# Altium PCB battery_board_v2(1).PcbDoc (part 2 of 2)
Units mm, origin at the board's own origin, x right, y up, seen from the top; angles counter-clockwise.
Board outline 90.17 x 96.01 mm, 4 copper layers (F.Cu, In1.Cu, In2.Cu, B.Cu); 129 components, 185 nets, 704 pads, 113 vias.
Unrouted connection lines stored in the file: 18.
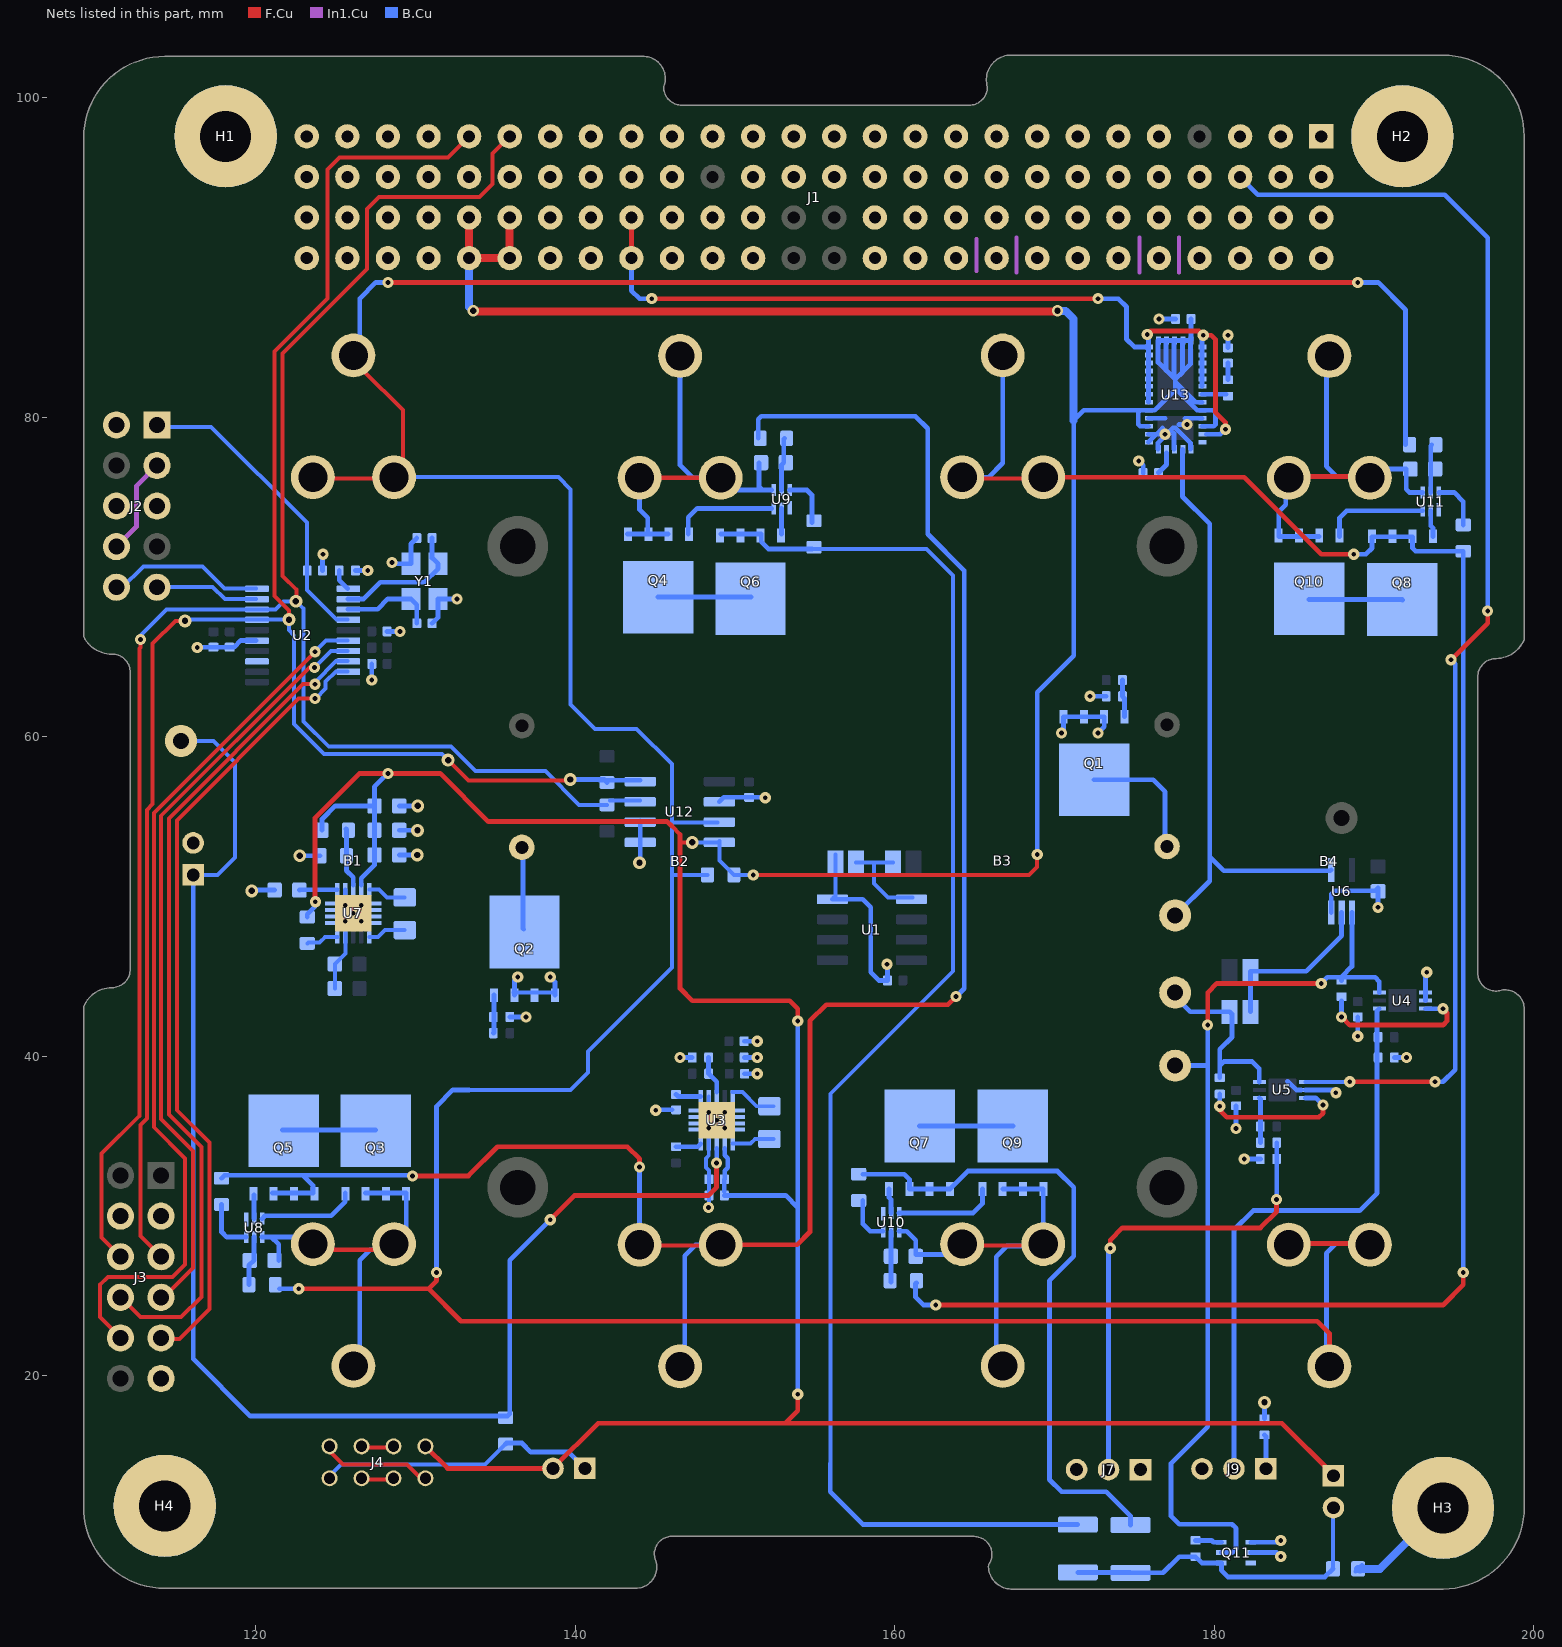
[diagram p4: the nets of this part, all layers, seen from the top]

## Via types
v1: diameter 0.7, hole 0.3, F.Cu to B.Cu, tented both sides, 93 vias
v2: diameter 0.8, hole 0.4, F.Cu to B.Cu, tented both sides, 17 vias
v3: diameter 0.7, hole 0.4, F.Cu to B.Cu, tented both sides, 3 vias

## Nets (pads, with @x,y where several pads share a name; then routed paths per layer and width w, separated by ;. In a path a pad name is that pad's centre, name@x,y a point inside that pad or via, vN(x,y) a via of type N, cw(c..) or ccw(c..) an arc to the next point about the centre after c; other vN are vias at no path point) (continued)
BCR_OUT: C8.1 C21.1 C26.1 C27.1 C28.1 C29.1 J1.93 J1.94 J1.95 J1.96 J4.1 J6.2 J8.1 R18.1 R24.1 R29.1 U3.2 U7.9 U12.8 U13.3 U13.5 U13.14 U13.15 U13.16 U13.17 U13.18 U13.26 U13.27 U13.29 | length 300.2
  F.Cu w0.25: 146.05,54.413 146.558,53.905 146.558,53.397 v2(147.32,53.397) ; v1(151.13,51.365) 168.402,51.365 168.91,51.873 v1(168.91,52.635)
  F.Cu w0.3: v1(123.725,49.689) 123.7,49.714 123.7,54.923 126.492,57.715 v1(128.27,57.715) 131.548,57.715 134.558,54.705 145.758,54.705 146.05,54.413 ; J4.1@130.618,15.596 132.001,14.213 J6.2@138.6,14.213 141.425,17.038 152.363,17.038 ; 146.558,53.905 146.558,44.253 147.32,43.491 153.416,43.491 153.924,42.983 v1(153.924,42.221) ; v1(153.924,18.853) 153.924,17.837 153.125,17.038 152.363,17.038 ; J8.1@187.425,13.838 184.225,17.038 152.363,17.038
  F.Cu w0.5: J1.95@133.35,92.513 J1.96@133.35,89.973 J1.94@135.89,89.973 J1.93@135.89,92.513 ; v3(133.604,86.671) 133.642,86.633 170.142,86.633 v3(170.18,86.671)
  B.Cu w0.25: v2(147.32,53.397) 148.924,53.397 149.01,53.483 149.01,52.278 R29.1@149.923,51.365 v1(151.13,51.365)
  B.Cu w0.3: R24.1@123.22,48.728 123.22,48.893 123.725,49.398 v1(123.725,49.689) ; R18.1@124.143,54.159 124.143,54.858 124.968,55.683 C26.1@127.425,55.683 ; U7.9@126.6,50.723 126.6,51.153 127.425,51.978 C28.1@127.425,52.613 127.425,54.513 C26.1@127.425,55.438 ; 127.425,54.758 C26.1@127.425,55.683 ; v1(128.27,57.715) 127.425,56.87 C26.1@127.425,55.683 ; C29.1@149.324,31.299 153.162,31.299 153.924,30.537 ; C29.1@149.324,31.553 C8.1@149.324,32.315 ; C8.1@149.35,32.315 149.35,32.847 149.544,33.041 149.544,33.621 149.35,33.815 U3.2@149.35,34.253 ; v1(153.924,18.853) 153.924,30.537 ; v1(153.924,42.221) 153.924,30.537 ; v1(168.91,52.635) 168.91,57.969 168.91,62.795 169.672,63.557 171.196,65.081 171.196,72.193 171.196,79.813 171.45,80.067 171.831,80.448 U13.5@175.87,80.448 ; U13.3@175.87,79.447 175.347,79.447 175.235,79.559 175.235,80.321 175.362,80.448 U13.5@175.87,80.448 ; U13.15@176.979,84.817 176.979,82.945 177.546,82.378 ; U13.16@177.479,84.817 177.479,82.445 177.546,82.378 ; U13.17@178.003,84.817 178.003,82.836 177.546,82.378 ; U13.18@178.529,84.817 178.534,84.822 C21.1@178.534,86.163 ; U13.29@179.222,79.447 179.948,79.447 180.061,79.559 180.061,80.321 179.934,80.448 179.222,80.448 178.918,80.448 177.546,81.82 177.546,82.378 ; U13.26@179.222,80.95 178.829,80.95 177.546,82.233 177.546,82.378 ; U13.5@175.87,80.448 176.261,80.448 177.546,81.733 177.546,82.378 ; 177.546,82.378 176.479,83.445 176.479,84.817 178.503,84.817 178.503,83.336 177.546,82.378
  B.Cu w0.5: J1.96@133.35,89.973 133.35,86.925 v3(133.604,86.671) ; v3(170.18,86.671) 170.688,86.671 171.196,86.163 171.196,79.813
EN_D1: TP6.1 U6.4 U13.33 | length 39
  B.Cu w0.3: TP6.1@177.546,48.825 179.704,50.983 179.704,52.763 ; U13.33@178.003,78.01 178.003,75.952 178.003,75.038 179.704,73.337 179.704,52.763 ; U6.4@187.31,51.679 187.25,51.619 180.594,51.619 179.704,52.509 179.704,52.763
EN_D3: Q11.5 R22.1 TP3.1 U4.6 U6.1 | length 58.9
  F.Cu w0.3: v1(179.578,41.967) 179.578,43.999 180.152,44.573 v1(186.69,44.573)
  B.Cu w0.3: TP3.1@177.546,39.427 179.578,39.427 ; v1(179.578,41.967) 179.578,39.427 ; Q11.5@180.436,8.947 181.102,8.947 181.356,9.201 181.356,10.471 181.102,10.725 177.8,10.725 177.292,11.233 177.292,14.535 179.578,16.821 179.578,39.427 ; v1(186.69,44.573) 187.07,44.953 190.054,44.953 190.322,44.685 U4.6@190.322,43.991 ; R22.1@187.96,44.763 187.96,44.985 188.61,45.635 U6.1@188.61,49.019
EPS_INT: J1.6 U5.1 | length 79.9
  F.Cu w0.3: v1(188.468,38.411) v1(193.802,38.411) ; v1(194.818,64.827) 197.104,67.113 v1(197.104,67.875)
  B.Cu w0.25: U5.1@185.708,38.403 188.46,38.403 v1(188.468,38.411)
  B.Cu w0.3: J1.6@181.61,95.053 182.722,93.941 194.406,93.941 197.104,91.243 v1(197.104,67.875) ; v1(193.802,38.411) 194.31,38.411 195.072,39.173 195.072,64.573 v1(194.818,64.827)
GND: C1.2 C2.2 C3.2 C4.2 C5.2 C6.2 C7.2 C8.2 C9.2 C10.2 C11.2 C12.2 C13.2 C14.1 C15.2 C20.1 C21.2 C22.2 C23.2 C24.2 C25.2 C26.2 C27.2 C28.2 C29.2 C30.2 C31.2 J1.61 J1.66 J1.69 J1.73 J1.74 J1.81 J1.82 J1.84 J1.99 J1.100 J2.3 J2.8 J3.3 J3.4 J3.11 J5.2 J7.3 JP4.1 Q1.1 Q1.2 Q1.3 Q2.1 Q2.2 Q2.3 Q11.1 Q11.2 R2.1 R7.1 R9.2 R10.2 R12.2 R15.2 R19.2 R21.2 U1.4 U2.15 U3.4 U3.7 U3.11 U4.1 U4.2 U5.2 U6.3 U7.4 U7.7 U7.11 U12.1 U12.2 U12.6 U13.1 U13.2 U13.4 U13.28 U13.32 U13.34 U13.36 Y1.2 Y1.4 | length 112
  In1.Cu w0.25: 165.1,89.163 165.1,91.163 ; 167.6,89.063 167.6,91.263 ; 175.3,89.063 175.3,91.263 ; 177.8,89.063 177.8,91.263
  In1.Cu w0.3: J2.8@111.272,71.909 112.522,73.159 112.522,75.699 J2.3@113.812,76.989
  B.Cu w0.25: C30.2@124.942,44.253 C31.2@124.942,45.777 125.6,46.435 U7.4@125.6,47.488 U7.11@125.6,48.463 ; Q2.3@136.14,44.011 137.41,44.011 Q2.1@138.68,44.011 ; v1(148.336,30.537) 148.364,30.565 C29.2@148.364,31.299 148.364,32.856 148.169,33.051 148.169,33.611 148.35,33.792 U3.4@148.35,34.538 U3.11@148.35,35.513 ; U3.11@148.35,36.513 U3.7@148.35,37.488 ; U1.4@156.165,49.938 156.27,50.043 JP4.1@156.27,52.648
  B.Cu w0.3: v1(116.332,65.589) 116.36,65.617 C5.2@117.348,65.617 C6.2@118.364,65.617 118.646,65.617 119.067,66.038 U2.15@120.025,66.038 ; v2(119.75,50.363) 119.8,50.413 C25.2@121.175,50.413 ; v2(122.75,52.563) R19.2@124.025,52.563 ; C3.2@124.178,70.415 124.178,71.403 v1(124.206,71.431) ; U7.7@125.6,50.438 U7.11@125.6,49.463 U7.11@126.1,48.963 ; R9.2@126.24,70.415 v1(127,70.415) ; v1(127.254,63.557) 127.259,63.562 C9.2@127.259,64.573 ; C7.2@128.219,66.605 v1(129.032,66.605) ; v1(128.524,70.923) 128.61,70.837 Y1.4@129.706,70.837 129.706,72.077 C2.2@130.076,72.447 ; C28.2@128.975,52.613 v2(130.1,52.613) ; C27.2@128.975,54.159 130.11,54.159 v2(130.12,54.149) ; C26.2@128.975,55.683 130.13,55.683 v2@130.14,55.673 ; C4.2@131.036,67.113 131.406,67.483 Y1.2@131.406,68.637 v1(132.588,68.637) ; R7.1@135.892,42.475 v1(136.906,42.475) ; Q2.3@136.183,43.839 136.183,44.749 v1(136.398,44.964) ; v1(138.43,44.964) 138.723,44.671 Q2.1@138.723,43.839 ; v2(144.018,52.127) 144.06,52.169 U12.2@144.06,54.753 ; v1(145.034,36.633) 145.062,36.661 C13.2@146.05,36.661 ; v1(146.558,39.935) R21.2@147.318,39.935 ; U12.6@149.01,55.937 149.292,56.219 C20.1@150.876,56.219 151.864,56.219 v1(151.892,56.191) ; C15.2@150.566,39.935 v1(151.384,39.935) ; C12.2@150.566,40.951 v1(151.384,40.951) ; C23.2@150.594,38.919 v1(151.384,38.919) ; U1.4@156.086,49.841 157.988,49.841 158.496,49.333 158.496,45.269 159.004,44.761 C1.2@159.54,44.761 159.54,45.749 v1(159.512,45.777) ; v1(170.434,60.255) 170.561,60.382 Q1.1@170.561,61.265 Q1.3@173.101,61.265 173.101,60.636 v1(172.72,60.255) ; v1(172.212,62.541) R2.1@173.226,62.541 ; v1(175.26,77.273) 175.542,76.991 C22.2@175.542,76.511 ; U13.1@175.87,78.445 176.755,79.33 ; U13.2@175.87,78.947 v1(176.908,78.947) v1@177.162,78.947 ; U13.4@175.87,79.947 176.93,79.947 ; U13.36@176.479,78.01 176.479,78.403 177.407,79.33 177.546,79.33 ; v1(176.53,86.163) C21.2@177.574,86.163 ; U13.34@177.479,78.01 177.479,79.01 ; 177.576,79.33 178.503,78.403 U13.32@178.503,78.01 ; 177.775,79.559 v1(178.283,79.559) ; 178.162,79.947 U13.28@179.222,79.947 ; C24.2@180.848,84.357 v1(180.848,85.147) ; v1(181.356,35.492) C11.2@181.356,36.915 ; v1(181.864,33.585) R12.2@182.878,33.585 ; Q11.2@182.276,8.947 183.896,8.947 v1(184.15,8.693) ; Q11.1@182.276,9.597 184.038,9.597 v1(184.15,9.709) ; R10.2@183.134,17.331 v2(183.134,18.345) ; 184.575,38.446 185.118,37.903 U5.2@185.42,37.903 ; U5.2@185.708,37.903 187.428,37.903 v1(187.602,37.728) ; U6.3@187.31,49.019 187.31,50.163 187.521,50.374 190.074,50.374 190.246,50.546 v1(190.246,49.333) ; v1(188.976,41.267) C10.2@188.976,42.475 ; R15.2@191.264,39.935 v1(192.024,39.935) ; U4.2@193.218,43.491 U4.1@193.218,43.991 193.218,45.193 v1(193.294,45.269)
  other v2: 130.14,55.683
I2C_SCK: J1.43 J3.5 R34.1 U2.17 U12.4 | length 118.6
  F.Cu w0.25: J3.5@114.165,27.383 112.776,28.772 112.776,35.703 113.175,36.102 113.175,55.439 113.538,55.802 113.538,65.843 114.959,67.264 v2(115.57,67.264) ; v2(122.075,67.343) 122.075,67.9 121.158,68.816 121.158,84.121 124.475,87.438 124.475,95.513 125.225,96.263 132.02,96.263 J1.43@133.35,97.593 ; v2(132.037,58.551) 133.325,57.263 139.6,57.263 v2(139.675,57.338)
  B.Cu w0.25: v2(115.57,67.264) 115.645,67.338 120.025,67.338 120.03,67.343 v2(122.075,67.343) 122.075,66.679 122.391,66.362 122.391,60.8 124.253,58.938 131.65,58.938 v2(132.037,58.551)
  B.Cu w0.3: v2(139.675,57.338) 141.792,57.338 R34.1@141.986,57.144 ; R34.1@141.515,57.293 U12.4@144.06,57.293
I2C_SDA: J1.41 J3.6 R35.1 U2.18 U12.3 | length 120.9
  F.Cu w0.25: J3.6@111.625,27.383 110.35,28.658 110.35,33.913 112.725,36.288 112.725,65.538 112.776,65.589 v1(112.776,66.097) ; v2(122.51,68.489) 122.54,68.519 122.54,69.213 121.666,70.087 121.666,83.993 126.95,89.277 126.95,93.038 127.7,93.788 133.988,93.788 134.803,94.603 134.803,96.506 J1.41@135.89,97.593
  B.Cu w0.25: v1(112.776,66.097) 112.776,66.351 113.03,66.605 114.413,67.988 121.235,67.988 121.736,68.489 v2(122.51,68.489) 122.975,68.024 122.975,60.978 124.565,59.388 128.95,59.388 ; 128.984,59.388 132.225,59.388 133.75,57.863 138.125,57.863 140.242,55.746 R35.1@141.986,55.746 ; R35.1@142.17,56.023 U12.3@144.06,56.023
IV_MON_N: B1.1 B4.1 R25.1 R29.2 R33.1 U12.7 | length 256.9
  F.Cu w0.25: B1.1@124.177,76.179 129.257,76.179 129.2,76.236 129.2,80.463 B1.1@126.717,82.946
  F.Cu w0.3: v1(122.682,25.457) 130.81,25.457 ; v1(128.27,88.449) v1(188.976,88.449) ; v1(131.318,26.473) 131.318,25.965 130.81,25.457 ; B4.1@184.468,28.297 B4.1@189.548,28.297 ; B4.1@187.198,20.599 187.198,22.663 186.436,23.425 132.842,23.425 130.81,25.457
  B.Cu w0.25: B1.1@128.651,76.257 138.938,76.257 139.7,75.495 139.7,62.033 141.224,60.509 143.827,60.509 146.04,58.297 146.04,54.711 145.996,54.667 ; 133.35,37.903 139.7,37.903 140.8,39.003 140.8,40.313 146.05,45.563 146.05,51.365 ; R29.2@148.273,51.365 146.05,51.365 ; U12.7@148.895,54.638 146.05,54.638 146.05,51.365
  B.Cu w0.3: R25.1@121.475,25.457 v1(122.682,25.457) ; B1.1@126.5,83.516 126.5,87.441 127.508,88.449 v1(128.27,88.449) ; v1(131.318,26.473) 131.318,36.887 132.334,37.903 133.35,37.903 ; B4.1@187.008,20.677 187.008,27.68 187.625,28.297 B4.1@189.548,28.297 ; v1(188.976,88.449) 190.246,88.449 191.961,86.734 R33.1@191.961,78.289
Net-(B1-Pad2): B1.2 C16.1 Q3.1 Q3.2 Q3.3 U8.4 | length 27.2
  F.Cu w0.3: B1.2@123.96,27.896 B1.2@129.04,27.896
  B.Cu w0.3: U8.4@120.388,28.692 123.164,28.692 B1.2@123.96,27.896 ; U8.4@120.396,28.692 120.979,28.692 121.433,28.238 C16.1@121.433,27.235 ; B1.2@126.5,20.27 126.5,27.243 127.153,27.896 129.04,27.896 129.413,28.269 129.413,31.447 Q3.3@126.873,31.447
Net-(B2-Pad1): B2.1 Q5.1 Q5.2 Q5.3 R26.1 R27.2 | length 129
  F.Cu w0.25: B2.1@144.277,28.179 B2.1@149.357,28.179
  F.Cu w0.3: v1(129.801,32.526) 133.307,32.526 135.128,34.347 143.256,34.347 144.018,33.585 v1(144.018,33.077) ; B2.1@149.098,28.219 153.892,28.219 154.686,29.013 154.686,32.061 154.686,42.221 155.702,43.237 163.322,43.237 v1(163.83,43.745)
  B.Cu w0.3: R27.2@117.856,32.378 118.047,32.569 122.936,32.569 ; Q5.3@121.031,31.447 123.571,31.447 123.571,31.934 122.936,32.569 ; v1(129.801,32.526) 129.758,32.569 122.936,32.569 ; B2.1@144.018,28.497 v1(144.018,33.077) ; B2.1@146.85,20.585 146.85,27.527 147.528,28.205 B2.1@149.39,28.205 ; R26.1@151.448,78.691 151.448,79.877 151.638,80.067 161.29,80.067 162.052,79.305 162.052,72.701 164.338,70.415 164.338,44.253 v1(163.83,43.745)
Net-(B2-Pad2): B2.2 C17.1 Q4.1 Q4.2 Q4.3 U9.4 | length 26.9
  F.Cu w0.3: B2.2@144.018,76.219 B2.2@149.098,76.219
  B.Cu w0.3: Q4.1@143.256,72.701 Q4.3@145.796,72.701 ; B2.2@144.018,76.219 144.018,74.225 144.526,73.717 Q4.2@144.526,72.701 ; B2.2@146.558,83.845 146.558,77.019 147.358,76.219 B2.2@149.098,76.219 149.861,75.456 152.281,75.456 151.698,75.456 151.498,75.656 C17.1@151.498,77.167
Net-(B3-Pad1): B3.1 Q8.1 Q8.2 Q8.3 R31.2 R32.1 | length 126.6
  F.Cu w0.25: B3.1@164.36,76.179 B3.1@169.44,76.179
  F.Cu w0.3: v1(162.56,24.441) 194.31,24.441 195.58,25.711 v1(195.58,26.473) ; B3.1@169.291,76.257 181.864,76.257 186.69,71.431 v1(188.722,71.431)
  B.Cu w0.3: R32.1@161.353,25.823 161.29,25.76 161.29,24.949 161.798,24.441 v1(162.56,24.441) ; B3.1@164.211,76.257 165.862,76.257 166.751,77.146 166.751,83.362 B3.1@166.35,83.763 ; v1(188.722,71.431) 189.484,71.431 189.865,71.812 189.865,72.529 192.405,72.529 192.405,71.812 192.595,71.622 R31.2@195.58,71.622 v1(195.58,26.473)
Net-(B3-Pad2): B3.2 C18.1 Q9.1 Q9.2 Q9.3 U10.4 | length 26
  F.Cu w0.25: B3.2@164.36,28.179 B3.2@169.44,28.179
  B.Cu w0.3: U10.4@160.266,29.058 160.737,29.058 161.303,28.492 161.303,27.601 163.268,27.601 B3.2@163.81,28.143 ; B3.2@166.35,20.517 166.35,27.469 167.024,28.143 168.89,28.143 169.291,28.544 Q9.1@169.291,31.701 Q9.3@166.751,31.701
Net-(B4-Pad2): B4.2 C19.1 Q10.1 Q10.2 Q10.3 U11.4 | length 25.9
  F.Cu w0.3: B4.2@184.468,76.297 B4.2@189.065,76.297
  B.Cu w0.3: B4.2@184.468,76.297 184.468,74.543 184.023,74.098 184.023,72.553 Q10.3@186.563,72.553 ; B4.2@187.008,83.923 187.008,76.955 187.666,76.297 189.548,76.297 190.016,76.765 192.011,76.765 192.011,75.508 192.211,75.308 U11.4@193.048,75.308
Net-(C2-Pad1): C2.1 U2.2 Y1.1 | length 8.5
  B.Cu w0.3: U2.2@125.75,68.638 126.747,68.638 127.79,69.681 128.27,69.681 128.276,69.687 130.556,69.687 131.406,70.537 Y1.1@131.406,70.837 131.036,71.207 C2.1@131.036,72.447
Net-(C4-Pad1): C4.1 U2.3 Y1.3 | length 5.9
  B.Cu w0.3: U2.3@125.75,67.988 127.621,67.988 128.27,68.637 Y1.3@129.706,68.637 130.076,68.267 C4.1@130.076,67.113
Net-(C13-Pad1): C13.1 U3.6 | length 1.6
  B.Cu w0.3: C13.1@146.304,37.621 146.437,37.488 U3.6@147.85,37.488
Net-(C16-Pad2): C16.2 R25.2 U8.5 | length 3.1
  B.Cu w0.3: R25.2@119.571,25.711 119.571,26.931 119.888,27.248 U8.5@119.888,28.692
Net-(C17-Pad2): C17.2 R26.2 U9.5 | length 3.3
  B.Cu w0.3: U9.5@152.908,75.456 152.908,77.027 153.048,77.167 153.048,78.641 R26.2@153.098,78.691
Net-(C18-Pad2): C18.2 R32.2 U10.5 | length 3.2
  B.Cu w0.3: R32.2@159.753,25.873 159.753,27.601 159.766,27.614 U10.5@159.766,29.058
Net-(C19-Pad2): C19.2 R33.2 U11.5 | length 3
  B.Cu w0.3: U11.5@193.548,75.308 193.548,78.226 R33.2@193.611,78.289
Net-(C22-Pad1): C22.1 U13.35 | length 1.4
  B.Cu w0.3: C22.1@176.502,76.55 177.005,77.052 U13.35@177.005,77.781
Net-(C24-Pad1): C24.1 R37.2 | length 1
  B.Cu w0.3: R37.2@180.848,82.355 C24.1@180.848,83.397
Net-(C25-Pad1): C25.1 U7.6 | length 2.4
  B.Cu w0.3: C25.1@122.725,50.413 122.75,50.438 U7.6@125.1,50.438
Net-(F1-Pad1): F1.1 Q6.1 Q6.2 Q6.3 R28.2 | length 92.8
  B.Cu w0.25: R28.2@154.813,71.77 161.967,71.77 163.64,70.097 163.64,45.333 155.956,37.649 155.956,14.535
  B.Cu w0.3: Q6.1@149.098,72.701 151.638,72.701 151.638,72.214 152.082,71.77 R28.2@154.813,71.77 ; 155.956,14.535 155.956,12.757 158.012,10.701 F1.1@171.45,10.701
Net-(F2-Pad1): F2.1 Q7.1 Q7.2 Q7.3 R30.2 | length 40.3
  B.Cu w0.3: R30.2@157.988,32.632 160.592,32.632 160.909,32.315 Q7.3@160.909,31.701 Q7.1@163.449,31.701 164.571,32.823 170.18,32.823 171.196,31.807 171.196,27.489 169.672,25.965 169.672,13.519 170.434,12.757 173.228,12.757 174.752,11.233 F2.1@174.752,10.677
Net-(FB1-Pad1): FB1.1 H3.1 | length 7.7
  B.Cu w0.25: FB1.1@188.82,7.771 FB1.1@189.225,8.176
  B.Cu w0.5: FB1.1@189.001,7.931 190.373,7.931 H3.1@194.31,11.868 ; FB1.1@189.108,7.896 FB1.1@189.225,8.013
Net-(J4-Pad2): J4.2 J4.3 | length 2
  F.Cu w0.25: J4.3@126.4,15.519 J4.2@128.4,15.519
Net-(J4-Pad4): J4.4 J4.5 | length 6.8
  F.Cu w0.25: J4.4@124.4,15.519 125.465,14.454 129.465,14.454 J4.5@130.4,13.519
Net-(J4-Pad6): J4.6 J4.7 | length 2
  F.Cu w0.25: J4.7@126.4,13.519 J4.6@128.4,13.519
Net-(J4-Pad8): J4.8 J6.1 R13.1 | length 17.8
  B.Cu w0.25: J4.8@124.4,13.519 125.335,14.454 134.348,14.454 R13.1@135.636,15.742
  B.Cu w0.3: R13.1@135.636,15.742 135.699,15.805 136.652,15.805 137.219,15.238 139.575,15.238 J6.1@140.6,14.213
Net-(J5-Pad1): J5.1 R13.2 TP1.1 U3.3 | length 91.8
  F.Cu w0.3: v1(138.43,29.775) 139.954,31.299 148.336,31.299 148.844,31.807 v1(148.844,33.331)
  B.Cu w0.25: TP1.1@115.316,59.747 117.348,59.747 118.69,58.405 118.69,52.453 117.602,51.365 J5.1@116.078,51.365
  B.Cu w0.3: J5.1@116.325,51.463 116.227,51.365 J5.1@116.078,51.365 116.078,21.064 119.654,17.488 135.75,17.488 135.89,17.628 135.89,27.235 v1(138.43,29.775) ; v1(148.844,33.331) 148.85,33.337 U3.3@148.85,34.253
Net-(J7-Pad2): J7.2 R12.1 R16.2 | length 29.9
  F.Cu w0.3: v1(173.482,27.997) 173.482,28.505 174.244,29.267 182.88,29.267 183.896,30.283 v1(183.896,31.049)
  B.Cu w0.3: J7.2@173.375,14.138 173.375,27.89 v1(173.482,27.997) ; v1(183.896,31.049) 183.898,31.05 R12.1@183.898,33.585 R16.2@183.898,34.601
Net-(J9-Pad1): J9.1 R10.1 | length 2.2
  B.Cu w0.3: R10.1@183.134,16.311 183.225,16.22 J9.1@183.225,14.188
Net-(J9-Pad2): J9.2 R14.2 R15.1 U4.4 | length 36.5
  B.Cu w0.3: J9.2@181.225,14.188 181.225,29.136 182.438,30.349 189.099,30.349 190.183,31.433 190.183,42.852 U4.4@190.322,42.991
Net-(JP1-Pad1): JP1.1 JP2.1 U6.2 | length 10.6
  B.Cu w0.3: JP1.1@182.258,42.795 JP2.1@182.258,45.335 185.74,45.335 187.96,47.555 U6.2@187.96,49.019
Net-(JP1-Pad2): JP1.2 R23.1 TP4.1 U5.6 | length 12.7
  B.Cu w0.3: TP4.1@177.546,43.745 178.496,42.795 JP1.2@180.958,42.795 181.102,42.651 181.102,41.205 180.34,40.443 R23.1@180.34,38.667 180.34,39.427 180.594,39.681 182.372,39.681 182.812,39.241 U5.6@182.812,38.403
Net-(JP3-Pad1): JP3.1 JP4.2 U1.5 | length 6.4
  B.Cu w0.25: JP4.2@157.57,52.127 158.685,52.127 ; JP3.1@159.878,52.127 158.685,52.127 ; U1.5@161.115,49.938 159.575,49.938 158.685,50.828 158.685,52.127
Net-(L1-Pad1): L1.1 U3.1 | length 2.7
  B.Cu w0.25: U3.1@149.85,34.538 150.965,34.538 151.26,34.833 L1.1@152.39,34.833
Net-(L1-Pad2): L1.2 U3.10 | length 2.9
  B.Cu w0.25: U3.10@149.85,37.773 150.46,37.773 151.35,36.883 L1.2@152.39,36.883
Net-(L2-Pad1): L2.1 U7.1 | length 2.4
  B.Cu w0.25: U7.1@127.1,47.488 127.655,47.488 128.075,47.908 L2.1@129.32,47.908
Net-(L2-Pad2): L2.2 U7.10 | length 2.4
  B.Cu w0.25: U7.10@127.1,50.438 127.72,50.438 128.2,49.958 L2.2@129.32,49.958
Net-(Q1-Pad4): Q1.4 R1.2 R2.2 | length 2.3
  B.Cu w0.3: R1.2@174.246,63.557 R2.2@174.246,62.541 174.371,62.416 Q1.4@174.371,61.265
Net-(Q1-Pad5): Q1.5 R3.1 | length 8.1
  B.Cu w0.3: Q1.5@172.466,57.315 176.168,57.315 176.91,56.573 R3.1@176.91,53.183
Net-(Q2-Pad4): Q2.4 R6.2 R7.2 | length 2.4
  B.Cu w0.3: R6.2@134.872,41.459 134.913,41.5 Q2.4@134.913,43.839
Net-(Q2-Pad5): Q2.5 R8.1 | length 5.1
  B.Cu w0.3: R8.1@136.725,53.086 136.725,48.011 Q2.5@136.775,47.961
Net-(Q3-Pad4): Q3.4 U8.3 | length 6.2
  B.Cu w0.3: U8.3@120.388,29.842 120.575,30.029 124.714,30.029 125.603,30.918 Q3.4@125.603,31.447
Net-(Q3-Pad5): Q3.5 Q5.5 | length 5.8
  B.Cu w0.3: Q5.5@121.666,35.397 Q3.5@127.508,35.397
Net-(Q4-Pad4): Q4.4 U9.3 | length 6.5
  B.Cu w0.3: Q4.4@147.066,72.701 147.066,73.738 147.634,74.306 U9.3@152.281,74.306
Net-(Q4-Pad5): Q4.5 Q6.5 | length 5.8
  B.Cu w0.3: Q4.5@145.161,68.751 Q6.5@151.003,68.751
Net-(Q5-Pad4): Q5.4 U8.2 | length 1.5
  B.Cu w0.3: U8.2@119.888,29.842 Q5.4@119.888,31.32
Net-(Q6-Pad4): Q6.4 U9.2 | length 1.6
  B.Cu w0.3: Q6.4@152.908,72.701 U9.2@152.908,74.306
Net-(Q7-Pad4): Q7.4 U10.2 | length 1.5
  B.Cu w0.3: Q7.4@159.639,31.701 159.639,31.172 159.766,31.045 U10.2@159.766,30.208
Net-(Q7-Pad5): Q7.5 Q9.5 | length 5.8
  B.Cu w0.3: Q7.5@161.544,35.651 Q9.5@167.386,35.651
Net-(Q8-Pad4): Q8.4 U11.2 | length 1.7
  B.Cu w0.3: U11.2@193.548,74.158 193.548,73.209 193.675,73.082 Q8.4@193.675,72.529
Net-(Q9-Pad4): Q9.4 U10.3 | length 6.4
  B.Cu w0.3: U10.3@160.266,30.208 164.898,30.208 165.481,30.791 Q9.4@165.481,31.701
Net-(Q10-Pad4): Q10.4 U11.3 | length 6.6
  B.Cu w0.3: Q10.4@187.833,72.553 187.833,73.717 188.274,74.158 U11.3@193.048,74.158
Net-(Q10-Pad5): Q8.5 Q10.5 | length 5.9
  B.Cu w0.3: Q10.5@185.928,68.603 191.746,68.603 Q8.5@191.77,68.579
Net-(Q11-Pad6): Q11.6 R36.2 | length 1.7
  B.Cu w0.3: R36.2@178.816,9.711 179.83,9.711 179.944,9.597 Q11.6@180.436,9.597
Net-(R9-Pad1): R9.1 U2.1 | length 1.3
  B.Cu w0.3: R9.1@125.22,70.415 125.22,69.818 U2.1@125.75,69.288
Net-(R11-Pad2): R11.2 R16.1 U5.4 | length 2.8
  B.Cu w0.3: U5.4@182.812,37.403 182.878,37.337 R11.2@182.878,35.617 R16.1@182.878,34.601
Net-(R17-Pad2): R17.2 U3.5 | length 1.6
  B.Cu w0.3: R17.2@146.306,34.347 147.659,34.347 U3.5@147.85,34.538
Net-(R18-Pad2): R18.2 R19.1 U7.8 | length 3.7
  B.Cu w0.3: R18.2@125.65,54.238 125.675,54.213 R19.1@125.675,52.563 125.675,51.628 126.1,51.203 U7.8@126.1,50.723
Net-(R20-Pad2): R20.2 R21.1 U3.8 | length 2.4
  B.Cu w0.3: R21.1@148.338,39.935 R20.2@148.338,38.919 148.85,38.407 U3.8@148.85,37.773
Net-(R22-Pad2): R22.2 U4.3 | length 10.2
  F.Cu w0.3: v1(187.96,42.475) 188.468,41.967 193.294,41.967 ; 193.04,41.967 194.31,41.967 194.564,42.221 194.564,42.729 v1(194.31,42.983)
  B.Cu w0.3: v1(187.96,42.475) R22.2@187.96,43.489 ; U4.3@193.218,42.991 194.302,42.991 v1(194.31,42.983)
Net-(R23-Pad2): R23.2 U5.3 | length 9.5
  F.Cu w0.3: v1(180.34,36.887) 180.34,36.633 180.782,36.191 186.546,36.191 186.8,36.445 v1(186.8,36.953)
  B.Cu w0.3: v1(180.34,36.887) R23.2@180.34,37.647 ; U5.3@185.708,37.403 186.35,37.403 v1(186.8,36.953)
Net-(R24-Pad2): R24.2 U7.5 | length 2
  B.Cu w0.25: R24.2@123.22,47.078 123.285,47.143 124,47.143 124.345,47.488 U7.5@125.1,47.488
Net-(R27-Pad1): R27.1 U8.6 | length 3.4
  B.Cu w0.3: R27.1@117.856,30.728 117.856,29.013 118.177,28.692 U8.6@119.388,28.692
Net-(R28-Pad1): R28.1 U9.6 | length 3.3
  B.Cu w0.3: U9.6@153.408,75.456 154.492,75.456 154.813,75.135 R28.1@154.813,73.42
Net-(R30-Pad1): R30.1 U10.6 | length 2.9
  B.Cu w0.3: R30.1@157.988,30.982 157.988,29.521 158.451,29.058 U10.6@159.266,29.058
Net-(R31-Pad1): R31.1 U11.6 | length 3.2
  B.Cu w0.3: U11.6@194.048,75.308 195.005,75.308 195.58,74.733 R31.1@195.58,73.272
Net-(R37-Pad1): R37.1 U13.25 | length 1.5
  B.Cu w0.3: U13.25@179.222,81.45 R37.1@180.745,81.45
NRST: C3.1 J2.1 U2.4 | length 19.1
  B.Cu w0.25: J2.1@114.115,79.413 117.19,79.413 123.19,73.413 123.19,69.209 125.061,67.338 U2.4@125.75,67.338
PACK_N: F1.2 F2.2 FB1.2 J8.2 Q11.4 R36.1 | length 21.4
  B.Cu w0.25: J8.2@187.42,11.833 187.425,11.838 FB1.2@187.425,7.933
  B.Cu w0.3: F1.2@171.45,7.701 174.728,7.701 F2.2@174.752,7.677 176.784,7.677 177.798,8.691 R36.1@178.816,8.691 179.21,8.297 Q11.4@180.436,8.297 180.436,7.835 180.848,7.423 186.919,7.423 FB1.2@187.427,7.931 FB1.2@187.391,7.896
PCM_IN: J1.87 J1.88 U13.6 U13.7 U13.8 U13.9 U13.10 U13.11 U13.12 U13.13 U13.19 U13.20 U13.21 U13.22 U13.23 U13.24 U13.30 | length 59.5
  F.Cu w0.3: J1.88@143.51,89.973 J1.87@143.51,92.513 ; v1(144.78,87.433) v1(172.72,87.433) ; v1(175.796,85.197) 176,85.401 179.045,85.401 v1(179.299,85.147) 179.807,85.147 180.061,84.893 180.061,80.321 180.694,79.688 v1(180.694,79.261)
  B.Cu w0.3: J1.88@143.51,89.973 143.51,87.941 144.018,87.433 v1(144.78,87.433) ; v1(172.72,87.433) 173.99,87.433 174.498,86.925 174.498,84.893 174.981,84.41 175.87,84.41 175.87,83.75 ; v1(175.796,85.197) 175.87,85.124 175.87,83.75 ; U13.6@175.87,80.95 175.87,83.75 ; U13.24@179.222,81.95 179.222,84.41 179.222,85.071 v1(179.299,85.147) ; U13.30@179.486,78.945 179.488,78.947 180.379,78.947 v1(180.694,79.261)
SWCLK: J2.10 U2.20 | length 9.6
  B.Cu w0.25: J2.10@111.575,69.253 111.575,69.287 112.958,70.669 116.669,70.669 118.05,69.288 U2.20@120.025,69.288
SWDIO: J2.9 U2.19 | length 6.3
  B.Cu w0.25: J2.9@114.115,69.253 114.261,69.399 117.303,69.399 118.064,68.638 U2.19@120.025,68.638
SYS_GPIO1: J3.10 U2.6 | length 55.5
  F.Cu w0.25: J3.10@111.625,22.303 110.236,23.692 110.236,25.711 110.733,26.208 114.797,26.208 115.57,26.981 115.57,33.623 113.625,35.569 113.625,55.253 123.698,65.326 v1(123.698,65.335)
  B.Cu w0.25: v1(123.698,65.335) 124.401,66.038 U2.6@125.75,66.038
SYS_GPIO2: J3.7 U2.7 | length 47.8
  F.Cu w0.25: J3.7@114.165,24.843 116.078,26.756 116.078,34.093 114.075,36.096 114.075,55.066 123.354,64.345 v1(123.672,64.345)
  B.Cu w0.25: v1(123.672,64.345) 124.714,65.388 U2.7@125.75,65.388
SYS_GPIO3: J3.8 U2.8 | length 52.1
  F.Cu w0.25: J3.8@111.625,24.843 112.789,23.679 115.316,23.679 116.586,24.949 116.586,34.347 114.554,36.379 114.554,54.909 122.948,63.303 v1(123.698,63.303)
  B.Cu w0.25: v1(123.698,63.303) 123.698,63.417 125.019,64.738 U2.8@125.75,64.738
SYS_GPIO4: J3.9 U2.9 | length 49.9
  F.Cu w0.25: J3.9@114.165,22.303 115.21,22.303 117.094,24.187 117.094,34.601 115.062,36.633 115.062,54.781 122.685,62.403 v1(123.698,62.403)
  B.Cu w0.25: v1(123.698,62.403) 123.753,62.403 124.373,63.023 124.373,63.456 125.005,64.088 U2.9@125.75,64.088
unconnected-(H1-Pad1): H1.1
unconnected-(H2-Pad1): H2.1
unconnected-(H4-Pad1): H4.1
unconnected-(J1-Pad1): J1.1
unconnected-(J1-Pad2): J1.2
unconnected-(J1-Pad3): J1.3
unconnected-(J1-Pad4): J1.4
unconnected-(J1-Pad5): J1.5
unconnected-(J1-Pad8): J1.8
unconnected-(J1-Pad9): J1.9
unconnected-(J1-Pad10): J1.10
unconnected-(J1-Pad11): J1.11
unconnected-(J1-Pad12): J1.12
unconnected-(J1-Pad13): J1.13
unconnected-(J1-Pad14): J1.14
unconnected-(J1-Pad15): J1.15
unconnected-(J1-Pad16): J1.16
unconnected-(J1-Pad17): J1.17
unconnected-(J1-Pad18): J1.18
unconnected-(J1-Pad19): J1.19
unconnected-(J1-Pad20): J1.20
unconnected-(J1-Pad21): J1.21
unconnected-(J1-Pad22): J1.22
unconnected-(J1-Pad23): J1.23
unconnected-(J1-Pad24): J1.24
unconnected-(J1-Pad25): J1.25
unconnected-(J1-Pad26): J1.26
unconnected-(J1-Pad27): J1.27
unconnected-(J1-Pad28): J1.28
unconnected-(J1-Pad29): J1.29
unconnected-(J1-Pad30): J1.30
unconnected-(J1-Pad31): J1.31
unconnected-(J1-Pad33): J1.33
unconnected-(J1-Pad34): J1.34
unconnected-(J1-Pad35): J1.35
unconnected-(J1-Pad36): J1.36
unconnected-(J1-Pad37): J1.37
unconnected-(J1-Pad38): J1.38
unconnected-(J1-Pad39): J1.39
unconnected-(J1-Pad40): J1.40
unconnected-(J1-Pad42): J1.42
unconnected-(J1-Pad44): J1.44
unconnected-(J1-Pad45): J1.45
unconnected-(J1-Pad46): J1.46
unconnected-(J1-Pad47): J1.47
unconnected-(J1-Pad48): J1.48
unconnected-(J1-Pad49): J1.49
unconnected-(J1-Pad50): J1.50
unconnected-(J1-Pad51): J1.51
unconnected-(J1-Pad52): J1.52
unconnected-(J1-Pad53): J1.53
unconnected-(J1-Pad54): J1.54
unconnected-(J1-Pad55): J1.55
unconnected-(J1-Pad56): J1.56
unconnected-(J1-Pad57): J1.57
unconnected-(J1-Pad58): J1.58
unconnected-(J1-Pad59): J1.59
unconnected-(J1-Pad60): J1.60
unconnected-(J1-Pad62): J1.62
unconnected-(J1-Pad63): J1.63
unconnected-(J1-Pad64): J1.64
unconnected-(J1-Pad65): J1.65
unconnected-(J1-Pad67): J1.67
unconnected-(J1-Pad68): J1.68
unconnected-(J1-Pad70): J1.70
unconnected-(J1-Pad71): J1.71
unconnected-(J1-Pad72): J1.72
unconnected-(J1-Pad75): J1.75
unconnected-(J1-Pad76): J1.76
unconnected-(J1-Pad83): J1.83
unconnected-(J1-Pad85): J1.85
unconnected-(J1-Pad86): J1.86
unconnected-(J1-Pad89): J1.89
unconnected-(J1-Pad90): J1.90
unconnected-(J1-Pad91): J1.91
unconnected-(J1-Pad92): J1.92
unconnected-(J1-Pad97): J1.97
unconnected-(J1-Pad98): J1.98
unconnected-(J1-Pad101): J1.101
unconnected-(J1-Pad102): J1.102
unconnected-(J1-Pad103): J1.103
unconnected-(J1-Pad104): J1.104
unconnected-(J2-Pad2): J2.2
unconnected-(J2-Pad5): J2.5
unconnected-(J2-Pad6): J2.6
unconnected-(J7-Pad1): J7.1
unconnected-(J9-Pad3): J9.3
unconnected-(Q11-Pad3): Q11.3
unconnected-(U2-Pad13): U2.13
unconnected-(U8-Pad1): U8.1
unconnected-(U9-Pad1): U9.1
unconnected-(U10-Pad1): U10.1
unconnected-(U11-Pad1): U11.1
unconnected-(U13-Pad31): U13.31
pads on no net: H5.1 H6.1 H7.1 H8.1 Q1.Un1 Q1.Un2 Q1.Un3 Q1.Un4 Q1.Un5 Q1.Un6 Q1.Un7 Q1.Un8 Q1.Un9 Q2.Un1 Q2.Un2 Q2.Un3 Q2.Un4 Q2.Un5 Q2.Un6 Q2.Un7 Q2.Un8 Q2.Un9 Q3.Un1 Q3.Un2 Q3.Un3 Q3.Un4 Q3.Un5 Q3.Un6 Q3.Un7 Q3.Un8 Q3.Un9 Q4.Un1 Q4.Un2 Q4.Un3 Q4.Un4 Q4.Un5 Q4.Un6 Q4.Un7 Q4.Un8 Q4.Un9 Q5.Un1 Q5.Un2 Q5.Un3 Q5.Un4 Q5.Un5 Q5.Un6 Q5.Un7 Q5.Un8 Q5.Un9 Q6.Un1 Q6.Un2 Q6.Un3 Q6.Un4 Q6.Un5 Q6.Un6 Q6.Un7 Q6.Un8 Q6.Un9 Q7.Un1 Q7.Un2 Q7.Un3 Q7.Un4 Q7.Un5 Q7.Un6 Q7.Un7 Q7.Un8 Q7.Un9 Q8.Un1 Q8.Un2 Q8.Un3 Q8.Un4 Q8.Un5 Q8.Un6 Q8.Un7 Q8.Un8 Q8.Un9 Q9.Un1 Q9.Un2 Q9.Un3 Q9.Un4 Q9.Un5 Q9.Un6 Q9.Un7 Q9.Un8 Q9.Un9 Q10.Un1 Q10.Un2 Q10.Un3 Q10.Un4 Q10.Un5 Q10.Un6 Q10.Un7 Q10.Un8 Q10.Un9 U1.2 U1.3 U1.6 U1.7 U4.7 U5.7 U13.DRAIN U13.GND

## Polygon pours and split planes (outlines as drawn)
GND on In1.Cu "In1.Cu-GND" (solid, remove dead copper, pour order 2): 199.39,6.661 109.22,6.661 109.22,102.673 110.49,102.673 199.39,102.673
3V3_CON on In2.Cu "In2.Cu-3V3_CON" (solid, remove dead copper, pour order 4): 171.45,56.445 174.498,56.445 196.596,56.445 196.596,32.569 196.554,29.887 141.944,29.633 141.986,31.807 142.1,43.243 171.45,43.237
3V3BUS on In2.Cu "In2.Cu-3V3BUS" (solid, remove dead copper, pour order 3): 199.39,6.661 109.22,6.661 109.22,102.673 199.39,102.673

## Keep-outs
Edge.Cuts:
  lines w0.1: 109.224,11.487 ccw(c114.304,11.799) 114.304,6.71 ; 109.224,11.487 ccw(c114.304,11.799) 114.304,6.71 ; 109.224,11.487 109.224,43.113 ; 109.224,11.487 109.224,43.113 ; 109.224,43.113 cw(c110.997,42.399) 110.997,44.31 ; 109.224,43.113 cw(c110.997,42.399) 110.997,44.31 ; 109.224,66.273 ccw(c110.977,67.139) 111.011,65.184 ; 109.224,66.273 ccw(c110.977,67.139) 111.011,65.184 ; 109.224,66.273 109.224,97.515 ; 109.224,66.273 109.224,97.515 ; 109.224,97.515 cw(c114.304,97.515) 114.304,102.595 ; 109.224,97.515 cw(c114.304,97.515) 114.304,102.595 ; 110.997,44.31 ccw(c110.997,45.453) 112.14,45.453 ; 110.997,44.31 ccw(c110.997,45.453) 112.14,45.453 ; 111.011,65.184 cw(c110.997,64.041) 112.14,64.041 ; 111.011,65.184 cw(c110.997,64.041) 112.14,64.041 ; 112.14,45.453 112.14,64.041 ; 112.14,45.453 112.14,64.041 ; 114.304,6.71 143.768,6.71 ; 114.304,6.71 143.768,6.71 ; 114.304,102.595 144.322,102.595 ; 114.304,102.595 144.322,102.595 ; 143.768,6.71 ccw(c143.768,8.038) 145.034,8.439 ; 143.768,6.71 ccw(c143.768,8.038) 145.034,8.439 ; 144.322,102.595 cw(c144.259,101.226) 145.519,100.686 ; 144.322,102.595 cw(c144.259,101.226) 145.519,100.686 ; 145.034,8.439 cw(c146.041,8.866) 145.915,9.953 ; 145.034,8.439 cw(c146.041,8.866) 145.915,9.953 ; 145.519,100.686 ccw(c146.662,100.686) 146.662,99.543 ; 145.519,100.686 ccw(c146.662,100.686) 146.662,99.543 ; 145.915,9.953 164.965,9.953 ; 145.915,9.953 164.965,9.953 ; 146.662,99.543 164.65,99.543 ; 146.662,99.543 164.65,99.543 ; 164.65,99.543 ccw(c164.65,100.686) 165.793,100.686 ; 164.65,99.543 ccw(c164.65,100.686) 165.793,100.686 ; 164.965,9.953 cw(c164.96,8.839) 165.862,8.185 ; 164.965,9.953 cw(c164.96,8.839) 165.862,8.185 ; 165.793,100.686 cw(c167.274,101.133) 167.132,102.673 ; 165.793,100.686 cw(c167.274,101.133) 167.132,102.673 ; 165.862,8.185 ccw(c167.306,8.105) 167.386,6.661 ; 165.862,8.185 ccw(c167.306,8.105) 167.386,6.661 ; 167.132,102.673 194.31,102.673 ; 167.132,102.673 194.31,102.673 ; 167.386,6.661 194.31,6.661 ; 167.386,6.661 194.31,6.661 ; 194.31,6.661 ccw(c194.265,11.79) 199.394,11.79 ; 194.31,6.661 ccw(c194.265,11.79) 199.394,11.79 ; 194.31,102.673 cw(c194.31,97.593) 199.39,97.593 ; 194.31,102.673 cw(c194.31,97.593) 199.39,97.593 ; 196.49,45.222 ccw(c197.611,45.213) 197.866,44.122 ; 196.49,45.222 ccw(c197.611,45.213) 197.866,44.122 ; 196.49,45.222 196.49,63.764 ; 196.49,45.222 196.49,63.764 ; 196.49,63.764 cw(c197.633,63.764) 197.633,64.907 ; 196.49,63.764 cw(c197.633,63.764) 197.633,64.907 ; 197.633,64.907 ccw(c197.606,66.841) 199.39,66.093 ; 197.633,64.907 ccw(c197.606,66.841) 199.39,66.093 ; 197.866,44.122 cw(c198.199,42.979) 199.39,42.979 ; 197.866,44.122 cw(c198.199,42.979) 199.39,42.979 ; 199.39,42.979 199.394,11.79 ; 199.39,42.979 199.394,11.79 ; 199.39,66.093 199.39,97.593 ; 199.39,66.093 199.39,97.593

## Silkscreen, mask and mechanical layers (free items; w line width, h text height)
F.SilkS:
  text "Programming" at 111.18,83.461 h1
  text "X | RST" at 111.998,81.707 h1
  text "CLK | DIO" at 111.355,66.751 h1
  text "5V0 | 3V3 / GND | GND / SDA | SCK / IO3 | IO2 / IO1 | IO4 / 5V0 | GND" at 111.448,36.462 h1
  text "Testing" at 112.202,15.851 h1
  text "Bypass" at 138.905,15.485 h1
  text "Deployment Timer" at 178.968,15.456 h1
  text "Watchdog Timer" at 171.508,15.356 h1
  text "Shunt" at 186.664,15.377 h1
  text "Deployment / Switches" at 119.919,13.9 h1
B.SilkS:
  text "." at 194.75,74.664 h1.5
  text "." at 154.11,74.41 h1.5
  text "." at 142.934,74.156 h1.5
  text "." at 148.776,74.156 h1.5
  text "." at 183.828,74.156 h1.5
  text "." at 189.67,74.156 h1.5
  text "." at 126.932,70.092 h1.5
  text "." at 169.858,62.218 h1.5
  text "Deloyment" at 118.303,57.083 h1
  text "3V3_CON" at 184.224,54.589 h1
  text "." at 142.68,53.582 h1.5
  text "." at 189.052,49.08 h1.5
  text "EN_D1" at 174.509,48.497 h1
  text "." at 127.682,47.244 h1.5
  text "." at 154.618,46.47 h1.5
  text "Timer" at 174.644,43.459 h1
  text "EN_D3" at 174.538,39.096 h1
  text "." at 150.3,34.278 h1.5
  text "." at 159.141,31.472 h1.5
  text "." at 163.508,31.23 h1.5
  text "." at 169.35,31.23 h1.5
  text "." at 119.176,31.164 h1.5
  text "." at 123.63,30.976 h1.5
  text "." at 129.472,30.976 h1.5
  text "Battery Board RevA, 2022-2023 / Griffin Jones & Jacob O'Riordan-Ross" at 159.113,11.178 h1
  text "SN: ____________" at 130.745,8.026 h1

## Dimensions
199.39,6.788 to 194.31,6.788 on F.Fab
199.39,6.788 to 199.39,11.868 on F.Fab
109.22,102.673 to 109.22,97.593 on F.Fab
109.22,102.673 to 199.39,102.673 on F.Fab
109.22,102.673 to 118.11,102.673 on F.Fab
109.22,6.788 to 114.3,6.788 on F.Fab
109.22,102.673 to 109.22,6.788 on F.Fab
109.22,102.673 to 191.77,102.673 on F.Fab
109.22,6.788 to 109.22,11.868 on F.Fab
109.22,71.939 to 109.22,31.807 on Dwgs.User
109.22,31.807 to 109.22,6.661 on Dwgs.User

## Text inside footprints (layer, text, board x,y; h text height)
J1: F.SilkS "H1" at 188.734,93.76 h1; F.SilkS "H2" at 188.698,89.185 h1